# Altium PCB fhd-gs.PcbDoc
Units mil, origin at the board's own origin, x right, y up, seen from the top; angles counter-clockwise.
Board outline 1400 x 650 mil, 6 copper layers (Top Layer, 2-GND, Layer 3, Layer 4, 5-GND, Bottom Layer), stack 46.142 mil thick; 80 components, 43 nets, 282 pads, 140 vias.
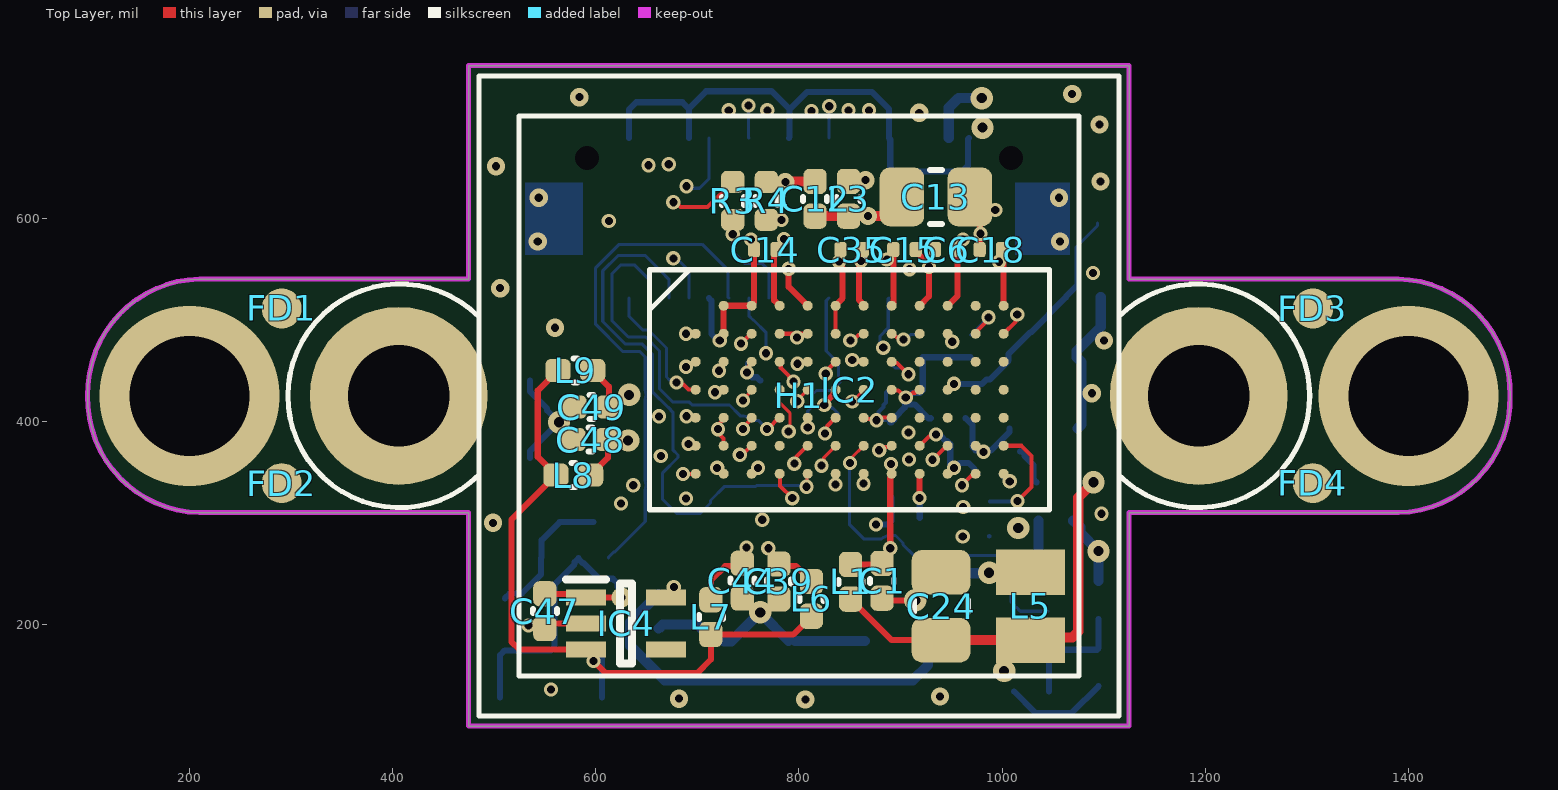
[diagram p0: Top Layer view]
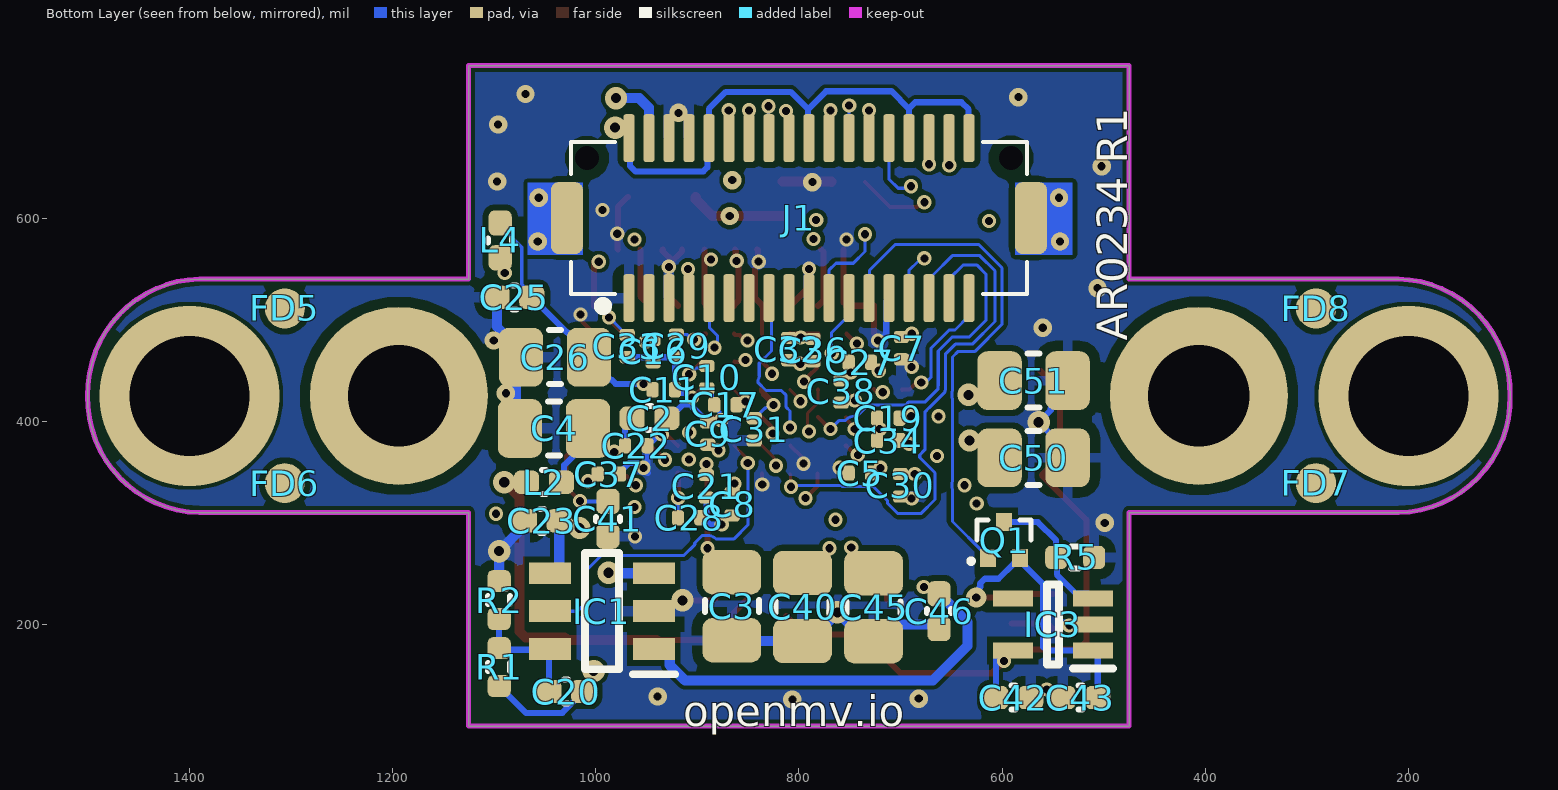
[diagram p1: Bottom Layer view, seen from below]
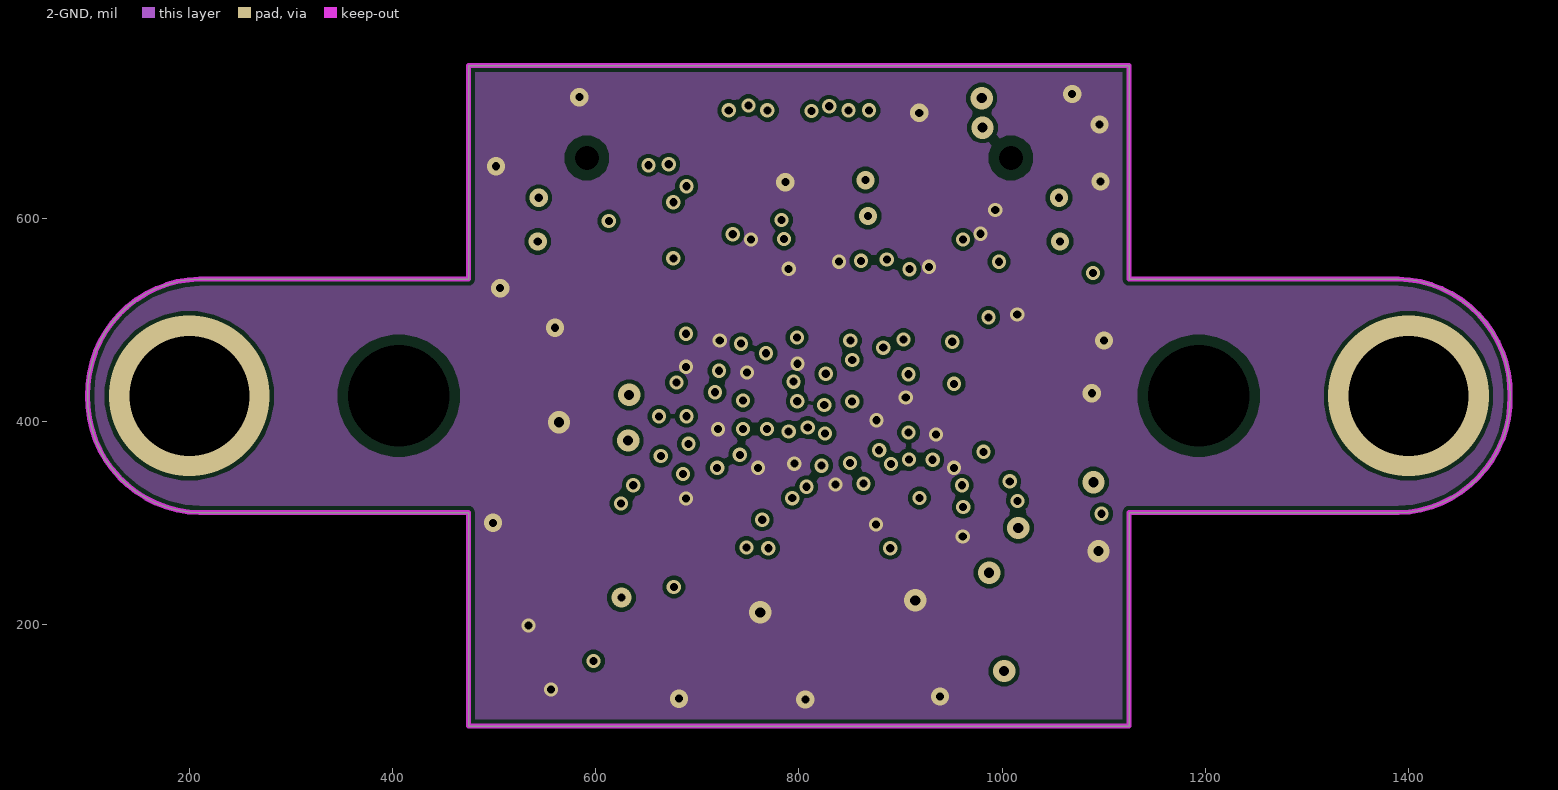
[diagram p2: 2-GND]
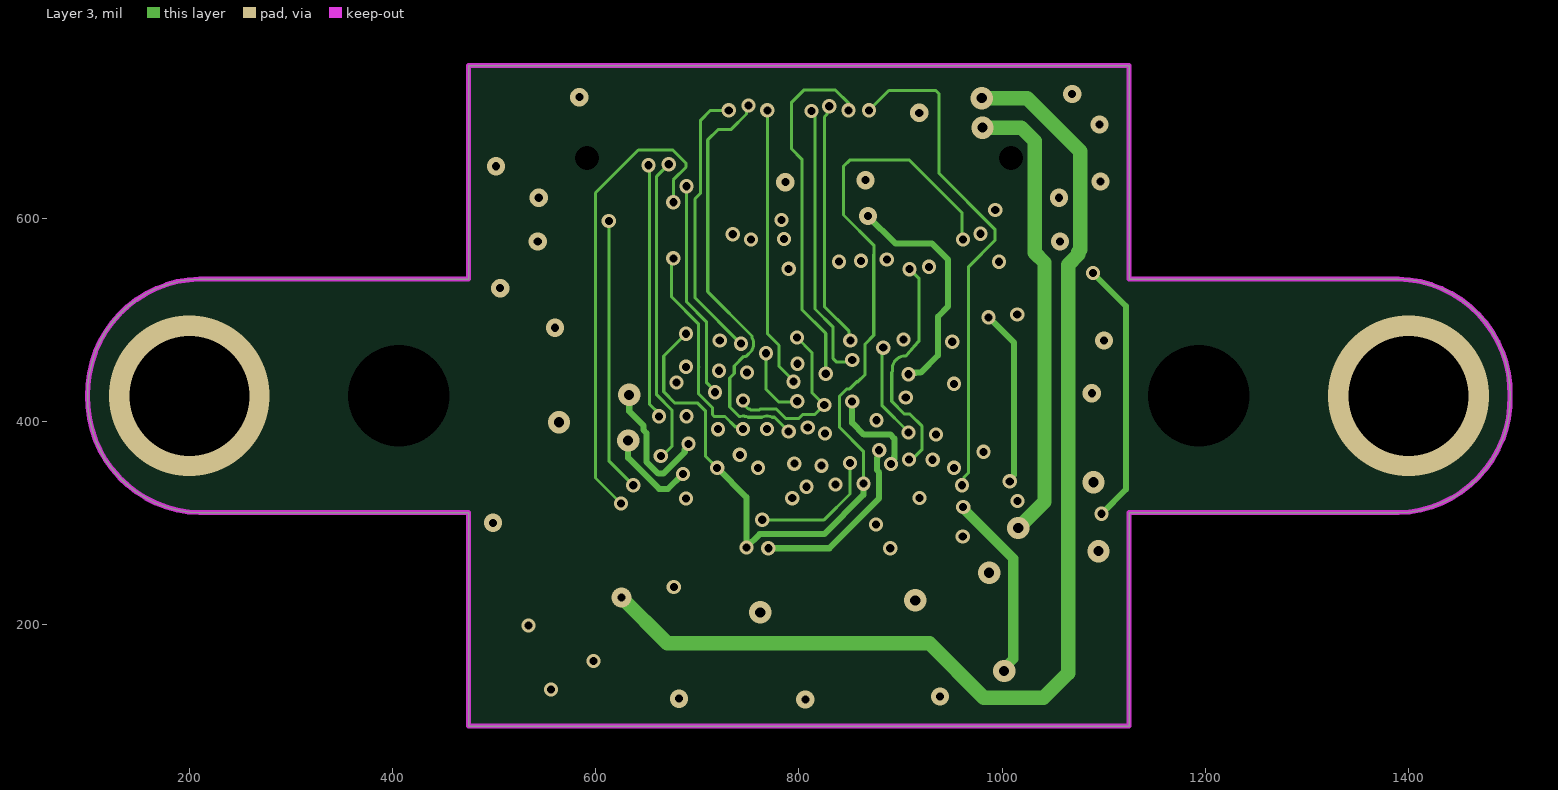
[diagram p3: Layer 3]
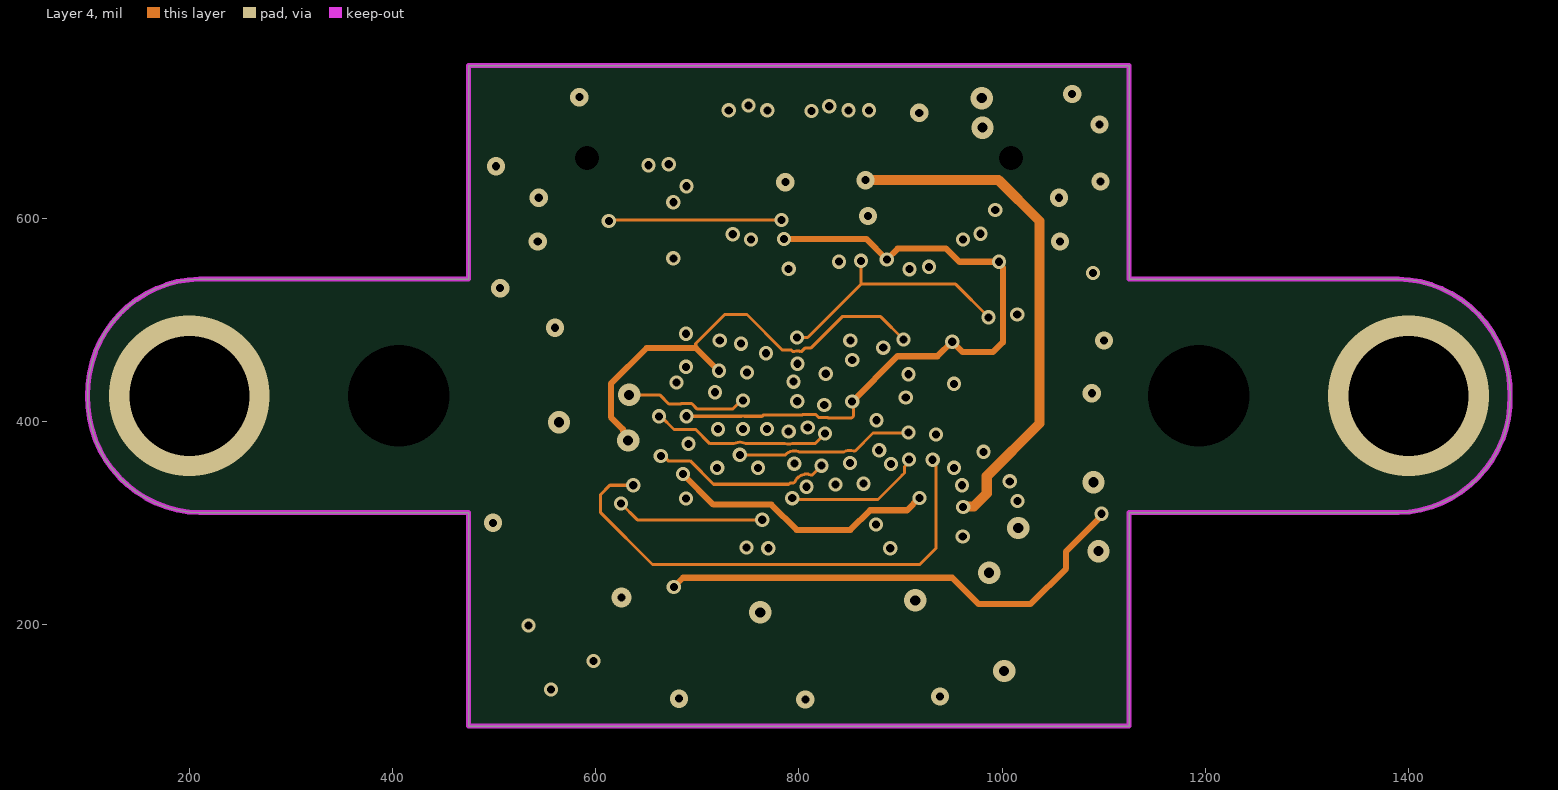
[diagram p4: Layer 4]
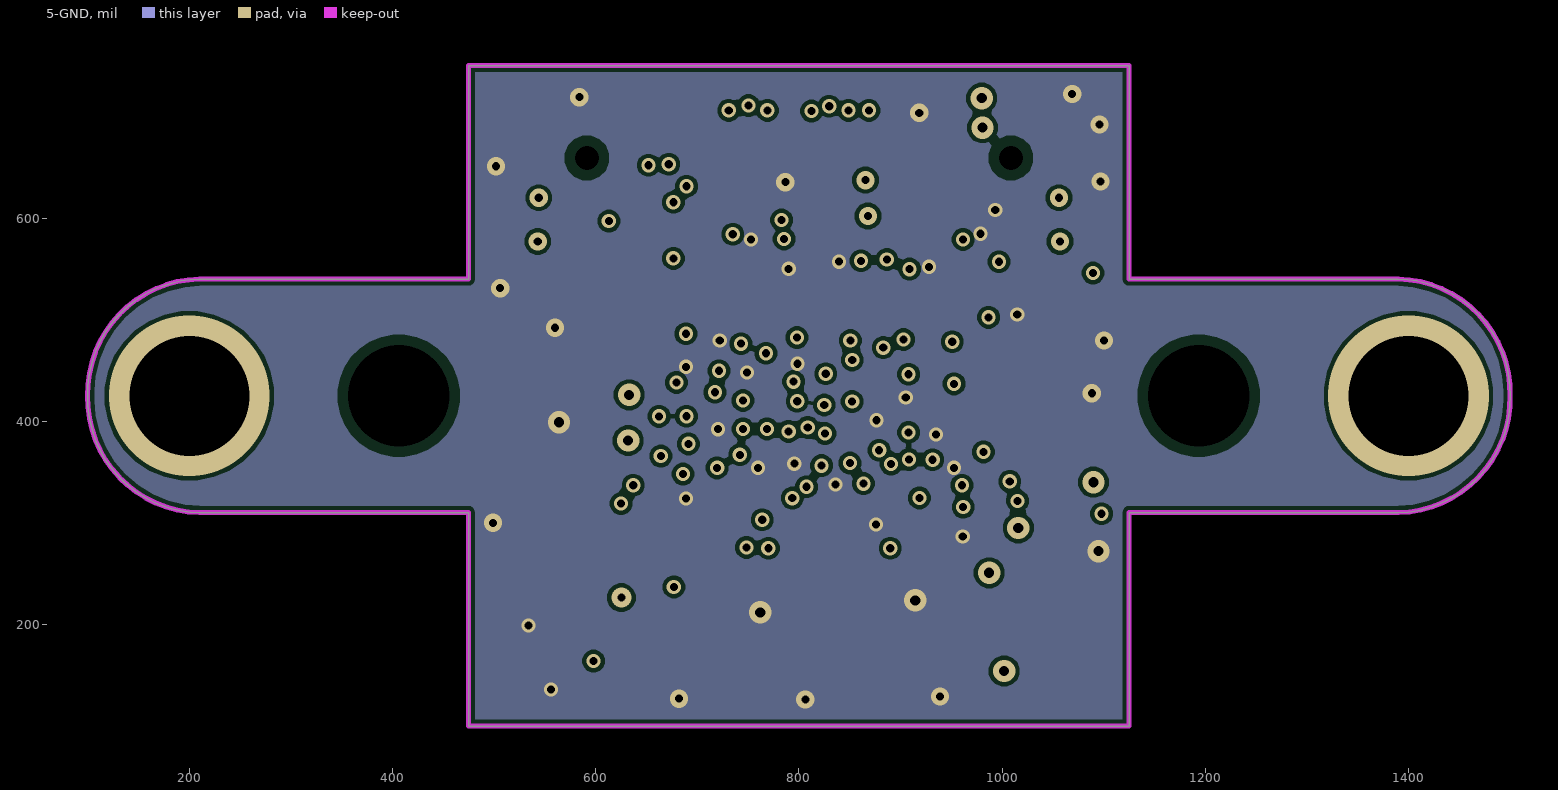
[diagram p5: 5-GND]
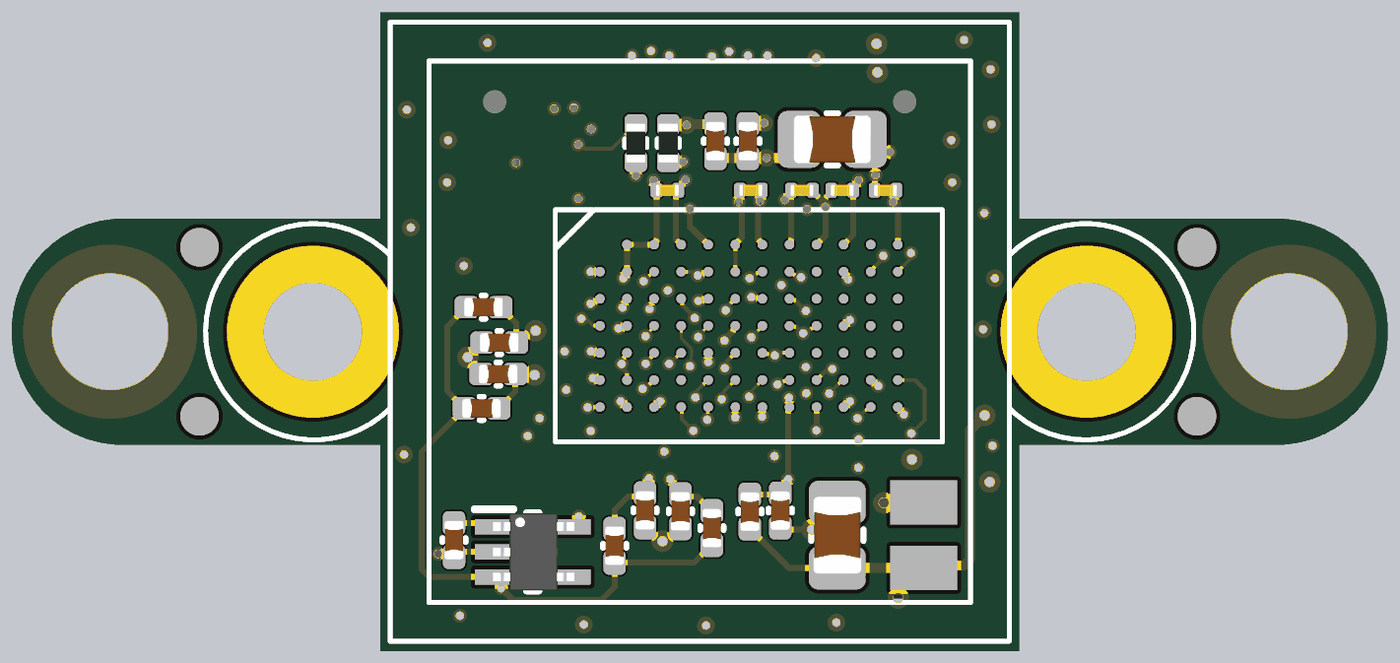
[diagram p6: 3D render of the assembled board from above, using the file's embedded part models]
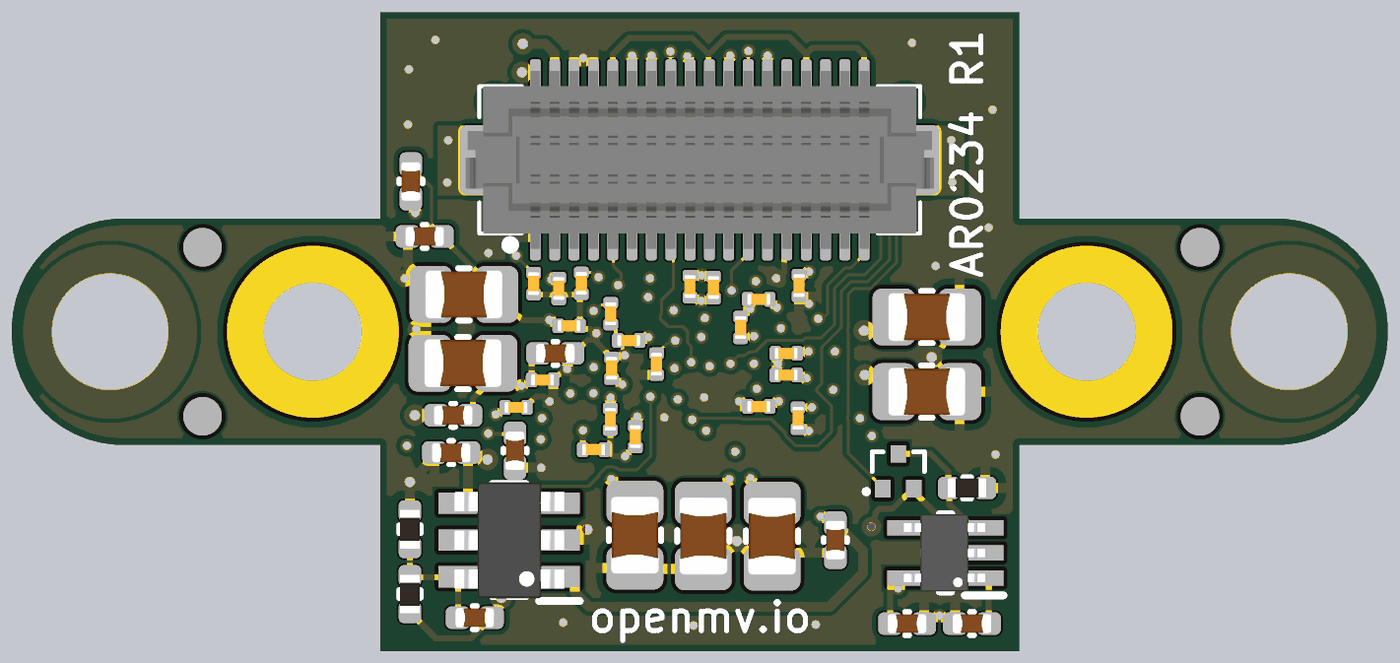
[diagram p7: 3D render of the assembled board from below, using the file's embedded part models]

## Layer stack, top to bottom
Top Solder: solder mask 0.4, Solder Resist, Dk 3.5
Top Layer: signal copper 1.378
Dielectric 2: prepreg 5, PP-006, Dk 4.1
2-GND: signal copper 1.378
Dielectric 5: prepreg 10, PP-006, Dk 4.1
Layer 3: signal copper 1.378
Dielectric 1: dielectric 7.874, FR-4, Dk 4.8
Layer 4: signal copper 1.378
Dielectric 6: prepreg 10, PP-006, Dk 4.1
5-GND: signal copper 1.378
Dielectric 9: prepreg 5, PP-006, Dk 4.1
Bottom Layer: signal copper 1.378
Bottom Solder: solder mask 0.4, Solder Resist, Dk 3.5

## Board outline
210.03,310 cw(c212.53,422.5) 100.03,425 cw(c212.53,427.5) 210.03,540 475.03,540 475.03,750 1125.03,750 1125.03,540 1390.03,540 cw(c1387.53,427.5) 1500.03,425 cw(c1387.53,422.5) 1390.03,310 1125.03,310 1125.03,100 475.03,100 475.03,310

## Design rules (kind name [scope] priority, off if disabled: settings)
BoardOutlineClearance [All] p1: gap=5 ignorepadtopadclearanceinfootprint=FALSE
Clearance [All] p1: gap=4 ignorepadtopadclearanceinfootprint=FALSE except(6: SMDPad-Fill SMDPad-Poly SMDPad-Region; 10: THPad-Fill THPad-Poly THPad-Region)
ComponentClearance Mount [InComponent('H1')] p1: gap=0 collisioncheckmode=3 verticalgap=0 showdistances=FALSE
ComponentClearance [not InComponent('H1')] p2: gap=6 collisioncheckmode=3 verticalgap=6 showdistances=FALSE
HoleSize [All] p1: absolutevalues=TRUE maxlimit=100 minlimit=8 maxpercent=80.000 minpercent=20.000
PolygonConnect [All] p1: thpad.connectstyle=Relief thpad.reliefconductorwidth=10 thpad.reliefentries=4 thpad.polygonreliefangle="90 Angle" thpad.airgapwidth=10 smdpad.connectstyle=Relief smdpad.reliefconductorwidth=10 smdpad.reliefentries=4 smdpad.polygonreliefangle="90 Angle" smdpad.airgapwidth=10 via.connectstyle=Direct via.reliefconductorwidth=10 via.reliefentries=4 via.polygonreliefangle="90 Angle" via.airgapwidth=10
RoutingVias [All] p1: holewidth=8 width=14 viastyle="Through Hole" minholewidth=8 minwidth=14 maxholewidth=50 maxwidth=100
SolderMaskExpansion [All] p1: expansion=4 istentingtop=FALSE
Width [All] p1: maxlimit=100 minlimit=3 preferedwidth=4
28 further rules are at their usual default settings.

## Components (designator, comment, footprint, x,y, rotation, side; value= is the part's Value field where it differs from the comment)
C1 "4.7uF" 0402 882,243 r90 top
C2 "4.7uF" 0402 947,403 r0 bottom
C3 "22uF" 0805 866,218 r90 bottom
C4 "22uF" 0805 1041,393 r180 bottom
C5 "0.22uF" C0201 740,349 r0 bottom
C6 "0.22uF" C0201 945,569 r180 top
C7 "0.22uF" C0201 699,472 r270 bottom
C8 "0.22uF" C0201 865.61,318.32 r270 bottom
C9 "0.22uF" C0201 889.7,387.87 r90 bottom
C10 "0.22uF" C0201 890.65,443.39 r270 bottom
C11 "0.22uF" C0201 933,431 r180 bottom
C12 "4.7uF" 0402 816,619 r270 top
C13 "22uF" 0805 934.96,620.86 r180 top
C14 "0.22uF" C0201 767,569 r180 top
C15 "0.22uF" C0201 904,569 r0 top
C16 "0.22uF" C0201 943.51,469.04 r270 bottom
C17 "0.22uF" C0201 872.33,416.15 r0 bottom
C18 "0.22uF" C0201 989,569 r180 top
C19 "0.22uF" C0201 712,403 r0 bottom
C20 "6.8pF" 0402 1029,134 r0 bottom
C21 "0.22uF" C0201 891,336 r270 bottom
C22 "0.22uF" C0201 960,376 r180 bottom
C23 "4.7uF" 0402 1053,302 r180 bottom
C24 "22uF" 0805 940,218 r270 top
C25 "4.7uF" 0402 1080,522 r180 bottom
C26 "22uF" 0805 1040,463 r180 bottom
C27 "0.22uF" C0201 740,458 r0 bottom
C28 "0.22uF" C0201 908,305 r180 bottom
C29 "0.22uF" C0201 920.53,474.24 r270 bottom
C30 "0.22uF" C0201 700,337 r270 bottom
C31 "0.22uF" C0201 844,392 r270 bottom
C32 "0.22uF" C0201 810,471 r270 bottom
C33 "0.22uF" C0201 969,474 r270 bottom
C34 "0.22uF" C0201 712,381 r0 bottom
C35 "0.22uF" C0201 852,569 r180 top
C36 "0.22uF" C0201 786,470 r270 bottom
C37 "0.22uF" C0201 987,348 r180 bottom
C38 "0.22uF" C0201 758.41,429.34 r90 bottom
C39 "4.7uF" 0402 780.4,242.32 r90 top
C40 "22uF" 0805 796.4,217.19 r90 bottom
C41 "4.7uF" 0402 988,304 r90 bottom
C42 "4.7uF" 0402 589,128 r0 bottom
C43 "4.7uF" 0402 523,128 r180 bottom
C44 "4.7uF" 0402 744.4,243.19 r90 top
C45 "22uF" 0805 726.43,216.91 r90 bottom
C46 "4.7uF" 0402 662,213 r90 bottom
C47 "4.7uF" 0402 550,213 r90 top
C48 "4.7uF" 0402 595,382 r0 top
C49 "4.7uF" 0402 596,414 r0 top
C50 "22uF" 0805 569,364 r0 bottom
C51 "22uF" 0805 569,440 r0 bottom
FD1 "FIDUCIAL1X2" FIDUCIAL-1X2 291,511 r0 top
FD2 "FIDUCIAL1X2" FIDUCIAL-1X2 291,339 r0 top
FD3 "FIDUCIAL1X2" FIDUCIAL-1X2 1306,511 r0 top
FD4 "FIDUCIAL1X2" FIDUCIAL-1X2 1306,339 r0 top
FD5 "FIDUCIAL1X2" FIDUCIAL-1X2 1306,511 r180 bottom
FD6 "FIDUCIAL1X2" FIDUCIAL-1X2 1306,339 r180 bottom
FD7 "FIDUCIAL1X2" FIDUCIAL-1X2 291,339 r180 bottom
FD8 "FIDUCIAL1X2" FIDUCIAL-1X2 291,511 r180 bottom
H1 "LENSMOUNT20MM" LENSMOUNT-20MM 800,425 r0 top locked
IC1 "TLV62568PDDCR" SOT95P280X110-6N 994,213 r0 bottom
IC2 "AR0234CSSC00SUKA0" AR0234CSSC00SUKA0 850,431 r0 top locked
IC3 "MIC5365-2.8YC5-TR" SOT65P210X110-5N 550,200 r0 bottom
IC4 "MIC5365-2.8YC5-TR" SOT65P210X110-5N 630,201 r0 top
J1 "DF12-36-DP" DF12-36-DP 800,600 r0 bottom locked
L1 "100" 0402 851,242 r270 top
L2 "100" 0402 1050.87,340 r0 bottom
L3 "100" 0402 849,619 r90 top
L4 "100" 0402 1094,578 r270 bottom
L5 "MAKK2016T2R2M" INDC2016X100N 1028,218 r90 top
L6 "100" 0402 812.4,225.19 r270 top
L7 "100" 0402 713.4,207.19 r270 top
L8 "100" 0402 578,347 r180 top
L9 "100" 0402 580,450 r180 top
Q1 "SSM3J15FV,L3F" SSM3J15FV 598,283 r180 bottom
R1 "100K" R0402 1095,158 r270 bottom
R2 "100K" R0402 1095,224 r90 bottom
R3 "10K" R0402 735,617 r270 top
R4 "1.5K" R0402 768,617 r270 top
R5 "100K" R0402 528,266 r180 bottom

## Footprints (in the part's own frame and the unit in brackets; to place one, negate y for a bottom-side part, rotate by r counter-clockwise, add the part's x,y. Pads: shape width x height; smd on the part's side, far side on the other; paste and mask are expansions set on the pad)
0402 [mm] "Chip Capacitor, 2-Leads, Body  0402 (in) 1005 (mm), IPC Medium Density"
  rrect52% 0.63x0.58 smd mask+0.05: 1(-0.435,0) 2(0.435,0)
  silkscreen extent -0.05,-0.3 0.05,0.3, body extent -0.5,-0.25 0.5,0.25, height 0.5
0805 [mm] "Chip Capacitor, Body 0805 imperial, 2.0x1.2mm, IPC Medium Density"
  rrect45% 1.11x1.47 smd: 1(-0.85,0) 2(0.85,0)
  silkscreen extent -0.15,-0.67 0.15,0.67, body extent -1,-0.62 1,0.63, height 1.25
AR0234CSSC00SUKA0 [mm] "AR0234CSSC00SUKA0"
  rrect100% 0.25x0.25 smd mask+0.051: P$1(-3.15,2.1) P$2(-2.45,2.1) P$3(-1.75,2.1) P$4(-1.05,2.1) P$5(-0.35,2.1) P$6(0.35,2.1) P$7(1.05,2.1) P$8(1.75,2.1) P$9(2.45,2.1) P$10(3.15,2.1) P$11(3.85,2.1) P$12(-3.85,1.4) P$13(-3.15,1.4) P$14(-2.45,1.4) P$15(-1.75,1.4) P$16(-1.05,1.4) P$17(-0.35,1.4) P$18(0.35,1.4) P$19(1.05,1.4) P$20(1.75,1.4) P$21(2.45,1.4) P$22(3.15,1.4) P$23(3.85,1.4) P$24(-3.85,0.7) P$25(-3.15,0.7) P$26(-2.45,0.7) P$27(-1.75,0.7) P$28(-1.05,0.7) P$29(-0.35,0.7) P$30(0.35,0.7) P$31(1.05,0.7) P$32(1.75,0.7) P$33(2.45,0.7) P$34(3.15,0.7) P$35(3.85,0.7) P$36(-3.85,0) P$37(-3.15,0) P$38(-2.45,0) P$39(-1.75,0) P$40(-1.05,0) P$41(-0.35,0) P$42(0.35,0) P$43(1.05,0) P$44(1.75,0) P$45(2.45,0) P$46(3.15,0) P$47(3.85,0) P$48(-3.85,-0.7) P$49(-3.15,-0.7) P$50(-2.45,-0.7) P$51(-1.75,-0.7) P$52(-1.05,-0.7) P$53(-0.35,-0.7) P$54(0.35,-0.7) P$55(1.05,-0.7) P$56(1.75,-0.7) P$57(2.45,-0.7) P$58(3.15,-0.7) P$59(3.85,-0.7) P$60(-3.85,-1.4) P$61(-3.15,-1.4) P$62(-2.45,-1.4) P$63(-1.75,-1.4) P$64(-1.05,-1.4) P$65(-0.35,-1.4) P$66(0.35,-1.4) P$67(1.05,-1.4) P$68(1.75,-1.4) P$69(2.45,-1.4) P$70(3.15,-1.4) P$71(3.85,-1.4) P$72(-3.85,-2.1) P$73(-3.15,-2.1) P$74(-2.45,-2.1) P$75(-1.75,-2.1) P$76(-1.05,-2.1) P$77(-0.35,-2.1) P$78(0.35,-2.1) P$79(1.05,-2.1) P$80(1.75,-2.1) P$81(2.45,-2.1) P$82(3.15,-2.1) P$83(3.85,-2.1)
  silkscreen extent -5,-3 5,3, body extent -5,-3 5,3, height 1
C0201 [mil] "0201 IPC-7351"
  rrect50% 12x15 smd mask+1.97: 1(-11,0) 2(11,0)
  body extent -12,-6 12,6, height 14
DF12-36-DP [mm] "36 Position Connector Receptacle, Center Strip Contacts Surface Mount Gold"
  rrect50% 0.8x1.8 smd mask+0.05: 0(-5.8,0) 0(5.8,0)
  rrect50% 0.28x1.2 smd mask+0.05: 1(4.25,2) 2(4.25,-2) 3(3.75,2) 4(3.75,-2) 5(3.25,2) 6(3.25,-2) 7(2.75,2) 8(2.75,-2) 9(2.25,2) 10(2.25,-2) 11(1.75,2) 12(1.75,-2) 13(1.25,2) 14(1.25,-2) 15(0.75,2) 16(0.75,-2) 17(0.25,2) 18(0.25,-2) 19(-0.25,2) 20(-0.25,-2) 21(-0.75,2) 22(-0.75,-2) 23(-1.25,2) 24(-1.25,-2) 25(-1.75,2) 26(-1.75,-2) 27(-2.25,2) 28(-2.25,-2) 29(-2.75,2) 30(-2.75,-2) 31(-3.25,2) 32(-3.25,-2) 33(-3.75,2) 34(-3.75,-2) 35(-4.25,2) 36(-4.25,-2)
  round 0 hole 0.6 unplated: MH1(-5.3,-1.5) MH2(5.3,-1.5)
  silkscreen extent -5.7,-1.9 5.7,2.3, body extent -6.05,-2.3 6.05,2.3, height 2.3
FIDUCIAL-1X2 [mm] "FIDUCIAL-1X2"
  rrect100% 1x1 smd paste+0: 1(0,0)
INDC2016X100N [mm] "INDC2016X100N"
  rect 1.14x1.73 smd: 1(-0.847,0) 2(0.847,0)
  body extent -1,-0.8 1,0.8, height 1
LENSMOUNT-20MM [mm] "LENSMOUNT-20MM"
  round 4.445 / inner round 0 / far side round 4.445 hole 2.54: P$1(-10,0) P$2(10,0)
  silkscreen extent -12.77,-8 12.77,8
R0402 [mm] "Chip Resistor, 2-Leads, Body  0402 (in) 1005 (mm), IPC Medium Density"
  rrect51% 0.55x0.58 smd mask+0.05: 1(-0.475,0) 2(0.475,0)
  silkscreen extent -0.1,-0.28 0.1,0.28, body extent -0.5,-0.25 0.5,0.25, height 0.34
SOT65P210X110-5N [mm] "SOT65P210X110-5N"
  rect 1x0.4 smd: 1(-1,0.65) 2(-1,0) 3(-1,-0.65) 4(1,-0.65) 5(1,0.65)
  silkscreen extent -1.5,-1 0.15,1.1, body extent -1.02,-1 1.07,1, height 0.96
SOT95P280X110-6N [mil] "SOT95P280X100-6N"
  rect 41.34x21.65 smd: 1(-51.18,37.4) 2(-51.18,0) 3(-51.18,-37.4) 4(51.18,-37.4) 5(51.18,0) 6(51.18,37.4)
  silkscreen extent -72,-57 17,62, body extent -56,-59 56,59, height 44
SSM3J15FV [mm]
  rect 0.4x0.45 smd: 1(-0.4,-0.45) 2(0.4,-0.45) 3(0,0.45)
  silkscreen extent -0.88,-0.58 0.67,0.5, body extent -0.6,-0.6 0.6,0.6, height 0.6

## Part data
C1 C2 C12 C23 C25 C39 C41 C42 C43 C44 C46 C47 C48 C49: library part CAP_0402, "0402 (1005 Metric) Nick Garner - TeleSense", MPN=JMK105BBJ475MV-F, DeviceSetName=CAP_0402, GateName_1=G$1, LibraryName=0402, SymbolName_1=CAP
C3 C4 C13 C24 C26 C40 C45 C50 C51: library part 22UF-0805-6.3V-20%, "22ÂµF ceramic capacitors    A capacitor is a passive two-terminal electrical component used to store electrical energy temporarily in an electric field.", MPN=CL21A226MQQNNNE, DeviceName=-0805-6.3V-20%, DeviceSetName=22UF, GateName_1=G$1, LibraryName=SparkFun-Capacitors, PROD_ID=CAP-08402, SymbolName_1=CAP
C5 C6 C7 C8 C9 C10 C11 C14 C15 C16 C17 C18 C19 C21 C22 C27 C28 C29 C30 C31 C32 C33 C34 C35 C36 C37 C38: library part C-EUC0201, "CAPACITOR, European symbol", MPN=GRM033R60J224ME15D, DeviceName=C0201, DeviceSetName=C-EU, GateName_1=G$1, LibraryName=rcl, POPULARITY=0, SPICEPREFIX=C, SymbolName_1=C-EU
C20: library part CAP_0402, "0402 (1005 Metric) Nick Garner - TeleSense", MPN=GRM1555C1H6R8DA01D, DeviceSetName=CAP_0402, GateName_1=G$1, LibraryName=0402, SymbolName_1=CAP
FD1 FD2 FD3 FD4 FD5 FD6 FD7 FD8: "Fiducial Alignment Points    Point-of-reference for pick-and-place machines and other optical instruments.", DeviceName=1X2, DeviceSetName=FIDUCIAL, GateName_1=G$1, LibraryName=SparkFun-Aesthetics, SymbolName_1=FIDUCIAL
IC1: "2.5V-5.5V input, 1A high efficiency step-down buck converter in SOT23 and SOT563 package   Source:  Datasheet", MANUFACTURER_NAME="Texas Instruments", DeviceSetName=TLV62568PDDCR, GateName_1=G$1, HEIGHT=1.1mm, LibraryName=TLV62568PDDCR, MANUFACTURER_PART_NUMBER=TLV62568PDDCR, MOUSER_PART_NUMBER=595-TLV62568PDDCR, MOUSER_PRICE-STOCK=https://www.mouser.co.uk/ProductDetail/Texas-Instruments/TLV62568PDDCR?qs=1mbolxNpo8f1FPchIXcxyQ%3D%3D, MPN=TLV62568PDDCR, SymbolName_1=TLV62568PDDCR
IC3 IC4: "IC REG LINEAR 2.8V 150MA SC70-5   Source:  Datasheet", MANUFACTURER_NAME=Microchip, DeviceSetName=MIC5365-2.8YC5-TR, GateName_1=G$1, HEIGHT=1.1mm, LibraryName=MIC5365-2.8YC5-TR, MANUFACTURER_PART_NUMBER=MIC5365-2.8YC5-TR, MOUSER_PART_NUMBER=998-MIC5365-2.8YC5TR, MOUSER_PRICE-STOCK=https://www.mouser.co.uk/ProductDetail/Microchip-Technology-Atmel/MIC5365-2.8YC5-TR?qs=U6T8BxXiZAX3mJDSWJyjVA%3D%3D, MPN=MIC5365-2.8YC5-TR, SymbolName_1=MIC5365-2.8YC5-TR
J1: MPN=DF12NB(3.0)-36DP-0.5V(51), DeviceSetName=DF12-36-DP, GateName_1=G$1, LibraryName=DF12NB(3.0)-36DP-0.5V(51), SymbolName_1=DF12-36
L1 L2 L3 L4 L6 L7 L8 L9: library part INDUCTOR_0402, MPN=MFBM1V1005-101-R, DeviceSetName=INDUCTOR_0402, GateName_1=G$1, LibraryName=0402, SymbolName_1=INDUCTOR
L5: "INDUCTOR, METAL CORE Check availability", PACKAGE="2016 Taiyo Yuden", AVAILABILITY="In Stock", DeviceSetName=MAKK2016T2R2M, GateName_1=G$1, LibraryName=MAKK2016T2R2M, MF="Taiyo Yuden", MP=MAKK2016T2R2M, MPN=MAKK2016T2R2M, PRICE=None, PURCHASE-URL=https://pricing.snapeda.com/search/part/MAKK2016T2R2M/?ref=eda, SymbolName_1=MAKK2016T2R2M
Q1: library part PMXB120EPEZ, "MOSFET 30 V, P-channel Trench MOSFET   Source:  Datasheet", DeviceSetName=SSM3J15FV,L3F, GateName_1=G$1, HEIGHT=0.4mm, LibraryName=SSM3J15FV,L3F, MANUFACTURER_PART_NUMBER=SSM3J15FV,L3F, MOUSER_PART_NUMBER=SSM3J15FV,L3F, MPN=SSM3J15FV,L3F, SymbolName_1=SSM3J15FV,L3F
R1 R2 R5: library part R-US_R0402, "RESISTOR, American symbol", MPN=AC0402FR-07100KL, DeviceName=R0402, DeviceSetName=R-US_, GateName_1=G$1, LibraryName=rcl, POPULARITY=34, SPICEPREFIX=R, SymbolName_1=R-US
R3: library part R-US_R0402, "RESISTOR, American symbol", MPN=AC0402FR-1310KL, DeviceName=R0402, DeviceSetName=R-US_, GateName_1=G$1, LibraryName=rcl, POPULARITY=34, SPICEPREFIX=R, SymbolName_1=R-US
R4: library part R-US_R0402, "RESISTOR, American symbol", MPN=RC0402FR-131K5L, DeviceName=R0402, DeviceSetName=R-US_, GateName_1=G$1, LibraryName=rcl, POPULARITY=34, SPICEPREFIX=R, SymbolName_1=R-US
H1: DeviceName=20MM, DeviceSetName=LENSMOUNT, GateName_1=G$1, LibraryName=lensmount, SymbolName_1=LENS
IC2: DeviceSetName=AR0234CSSC00SUKA0, GateName_1=G$1, LibraryName=AR0234CSSC00SUKA0, MPN=AR0234CSSC00SUKA0, SymbolName_1=AR0234CSSC00SUKA0

## Via types
v1: diameter 14, hole 8, Top Layer to Bottom Layer, tented both sides, 104 vias
v2: diameter 18, hole 8, Top Layer to Bottom Layer, tented both sides, 21 vias
v3: diameter 22, hole 10, Top Layer to Bottom Layer, tented both sides, 12 vias
v4: diameter 177.17/158.11/158.11/158.11/158.11/177.17 (per signal layer), hole 118.11, Top Layer to Bottom Layer, 2 vias
v5: diameter 20, hole 8, Top Layer to Bottom Layer, tented both sides, 1 vias

## Nets (pads, with @x,y where several pads share a name; then routed paths per layer and width w, separated by ;. In a path a pad name is that pad's centre, name@x,y a point inside that pad or via, vN(x,y) a via of type N, cw(c..) or ccw(c..) an arc to the next point about the centre after c; other vN are vias at no path point)
DCMI_CLK: IC2.P$82 J1.12 | length 517.6
  Top Layer w4: v1(960.57,337.06) 969.49,345.98 970.1,345.98 972.44,348.32 IC2.P$82@973.48,348.32
  Layer 3 w3: v1(869,706) 888.64,725.64 934.85,725.64 938,722.49 938,644 992.95,589.05 992.95,577.95 967.1,552.1 967.1,349.47 962.68,345.05 962.68,339.16 v1(960.57,337.06)
DCMI_D0: IC2.P$62 J1.9 | length 335.9
  Top Layer w4: v1(741.95,366.96) 744.21,366.96 753.13,375.88 IC2.P$62@754.08,375.88
  Layer 3 w3: v1@881.66,472.34 881.66,415.68 908,389.34 v1(908,389)
  Layer 4 w3: v1(741.95,366.96) 786.63,366.96 cw(c795.59,358.25) 799.57,370.1 cw(c795.59,358.25) 800.01,369.95 844.62,369.95 cw(c850.31,358.82) 853.83,370.81 854.23,370.81 855.48,370.81 873.1,388.43 907.43,388.43 v1(908,389)
  Bottom Layer w3: v1@880,474 880,484 888,492 888,520.68 J1.9
  other v1: 883.09,472.43
DCMI_D1: IC2.P$75 J1.7 | length 388.2
  Top Layer w4: IC2.P$75@781.64,348.32 781.64,336.24 v1(793.57,324.31)
  Layer 3 w3: v1(909.05,549.71) 918.4,540.36 918.4,479.06 917.66,478.21 906.28,465.18 906.21,465.11 905.33,464.23 904.9,464.23 ccw(c904.52,451.74) 892.09,450.39 cw(c889.11,450.07) 891.5,448.26 891.44,448.18 891.44,419.56 904,407 909.4,407 921.4,395 921.4,372.4 v1@912.61,363.61
  Layer 4 w3: v1(793.57,324.31) 794.88,323 878,323 901.11,346.11 901.11,346.24 904,349.13 904,355.2 908.31,359.51 v1(908.31,362.46)
DCMI_D2: IC2.P$76 J1.31 | length 545.2
  Top Layer w3: v1(807.66,335.5) 808.16,336 808.16,347.82 IC2.P$76
  Bottom Layer w3: J1.31 672.05,539.78 668.54,543.29 668.54,543.46 649,563 622,563 607,548 607,498.23 629.35,475.88 646.02,475.88 655.82,466.08 655.82,431.91 ccw(c658.82,431.95) 655.89,431.32 cw(c633,426) 656.35,428.65 670.8,414.2 cw(c662.5,404.85) 671.85,413.15 676,409 676,371.83 681.03,366.8 681.03,364.31 666,349.28 666,323 680,309 702.52,309 713,319.48 713,322 727,336 757.52,336 758.33,336.81 806.36,336.81 v1(807.66,335.5)
DCMI_D3: IC2.P$50 J1.29 | length 269
  Top Layer w4: v1(745.03,392.5) 745.03,393.71 753.54,402.23 IC2.P$50@753.54,403.57
  Layer 3 w3: v1(676.5,560.35) 674.8,558.65 674.8,522.2 701.41,495.59 701.41,454.83 cw(c688.98,453.56) 701.41,452.3 701.41,426.86 715,413.27 715,406.47 716.76,404.71 727.29,404.71 737.4,394.6 742.92,394.6 v1(745.03,392.5)
  Bottom Layer w3: v1(676.5,560.35) 678.6,558.25 681.86,558.25 691.73,548.38 J1.29
DCMI_D4: IC2.P$36 J1.35 | length 130.2
  Top Layer w4: v1(679.53,438.24) 681.44,436.33 686.37,436.33 691.34,431.36 698.07,431.36 IC2.P$36
  Bottom Layer w3: J1.35 632.68,503.56 646.36,489.88 652.08,489.88 669.82,472.14 669.82,443.56 673.04,440.35 677.42,440.35 v1(679.53,438.24)
DCMI_D5: IC2.P$37 J1.28 | length 290.8
  Top Layer w4: v1(717.41,428.54) 718.76,429.88 724.32,429.88 IC2.P$37@725.98,431.54
  Layer 3 w3: v1(689.56,631.26) 689.56,517.34 708.93,497.97 708.93,438.28 717.41,429.8 v1(717.41,428.54)
  Bottom Layer w3: v1(689.56,631.26) 691.49,629.33 702.33,629.33 711.42,638.42 J1.28
DCMI_D6: IC2.P$14 J1.26 | length 286.8
  Top Layer w4: v1(742.96,476.35) 743.23,476.35 IC2.P$14@753,486.12
  Layer 3 w3: v1(731,706) 713,706 703.38,696.38 703.38,624.62 697.73,618.97 697.73,521.58 v1(742.96,476.35)
DCMI_D7: IC2.P$51 J1.33 | length 345.5
  Top Layer w4: v1(768.75,392.5) 769.62,392.5 IC2.P$51@781.1,403.98
  Bottom Layer w3: J1.33 652.36,539.64 638,554 625,554 616,545 616,499.13 632.25,482.88 649.19,482.88 662.82,469.24 662.82,435.33 ; 662.82,435.31 662.89,434.74 662.89,432.07 cw(c633,426) 662.91,431.99 675.62,419.28 cw(c662.5,404.85) 676.08,418.85 692.29,418.85 695.1,416.04 731.68,416.04 741.88,405.84 742.76,404.97 744,404.97 744.1,404.97 cw(c745.03,392.5) 754.02,401.18 754.57,400.63 760.62,400.63 v1(768.75,392.5)
DCMI_D8: IC2.P$39 J1.24 | length 495.7
  Top Layer w3: IC2.P$39@781.1,430.57 781.1,418.18 791.52,407.76 791.52,399.12 791.33,398.93 791.33,391.33 v1(790,390)
  Top Layer w4: IC2.P$39@781.1,430.57 IC2.P$39
  Layer 3 w3: v1(750.52,710.66) 748.46,708.6 748.46,702.46 733,687 720.38,687 710.38,677 710.38,527.56 754,483.94 754,482.21 cw(c742.96,476.35) 754,470.49 754,469.72 748.13,463.85 745.85,463.85 736.45,454.45 736.45,447.03 732,442.58 732,414 740.34,405.66 741.21,404.79 742.46,404.79 742.72,404.79 cw(c745.03,392.5) 750.11,403.92 763.67,403.92 cw(c768.75,392.5) 773.83,403.92 776.08,403.92 v1(790,390)
  Bottom Layer w3: v1(750.52,710.66) 750.66,710.53 750.66,678.87 J1.24
DCMI_D9: IC2.P$27 J1.22 | length 288.6
  Top Layer w4: IC2.P$27 782.22,457.44 782.22,452.49 v1@790.39,444.32
  Layer 3 w3: v1(769,706) 769,486.31 780.57,474.74 780.57,454.14 v1@790.39,444.32
  other v1: 794.88,438.97
DCMI_FSIN: IC2.P$40 J1.23 | length 148.9
  Top Layer w3: v1(798.41,419.68) 798.41,420.75 IC2.P$40
  Layer 3 w3: v1(767.59,466.98) 767.59,431.66 780.25,419 797.73,419 v1(798.41,419.68)
  Bottom Layer w3: J1.23 750.79,503.83 754.98,499.64 755.36,499.64 767.85,487.15 767.85,467.24 v1(767.59,466.98)
DCMI_HSYNC: IC2.P$30 J1.18 | length 283.5
  Top Layer w4: v1@851.82,458.16 852.16,458.5 863.18,458.5 IC2.P$30@863.24,458.56
  Layer 3 w3: v1(812.58,705.26) 812.58,703.64 816,700.22 816,510.42 833.79,492.63 833.79,461.6 837.23,458.16 v1@851.82,458.16
  other v1: 852.53,460.27
DCMI_PCLK: IC2.P$29 J1.14 | length 370.2
  Top Layer w4: v1(826.5,446.78) 826.5,448.84 IC2.P$29
  Layer 3 w3: v1(826.5,446.78) 826.5,486.5 803,510 803,658 793,668 793,714.07 804.85,725.92 836.08,725.92 849,713 v1(849,706)
DCMI_PWDN: J1.25 Q1.1 | length 509.7
  Bottom Layer w3: Q1.1@612.76,265.28 612.76,266.26 617.65,271.15 618.63,271.15 648.82,301.34 648.82,332.94 ccw(c637,337) 648.82,341.06 648.82,421.32 ccw(c633,426) 648.82,430.68 648.82,463.18 643.12,468.88 626.45,468.88 600,495.33 600,550.97 623.16,574.14 704.86,574.14 730.46,548.54 730.46,521.9 J1.25
DCMI_RST: J1.21 R3.2 | length 87.4
  Bottom Layer w3: v1(735,584) 735,567 746.5,555.5 763.5,555.5 770.46,548.54 J1.21
DCMI_SCL: IC2.P$65 J1.32 | length 506.7
  Top Layer w3: v1(822.44,356.29) 824.54,358.4 824.54,364.19 IC2.P$65
  Layer 3 w3: v1(664.17,365.77) 665.68,365.77 675,375.09 675,411.02 660.03,426 660.03,641.03 v1(672,653)
  Layer 4 w3: v1(664.17,365.77) 666.66,365.77 671.43,361 693,361 716,338 790,338 791.23,339.23 794.94,339.23 795.82,340.11 796.2,340.49 cw(c807.66,335.5) 811.74,347.32 812.22,347.32 813.46,347.32 v1(822.44,356.29)
DCMI_SDA: IC2.P$53 J1.34 | length 450.7
  Top Layer w4: v1(825.72,387.84) 827.63,389.76 827.63,395.09 IC2.P$53@836.22,403.68
  Layer 3 w3: v1(652,652) 653,651 653,416.75 662.5,407.25 v1(662.5,404.85)
  Layer 4 w3: v1(662.5,404.85) 664.15,404.85 677.2,391.8 698.55,391.8 712.35,378 736.08,378 cw(c741.95,366.96) 747.83,378 786.5,378 ccw(c790,390) 793.5,378 815.87,378 v1(825.72,387.84)
DCMI_VSYNC: IC2.P$18 J1.16 | length 290.4
  Top Layer w4: v1(850.69,479.49) 853.11,479.49 858.62,485 862.66,485 IC2.P$18
  Layer 3 w3: v1(829.92,710.11) 827.81,708 827.81,702.13 825.34,699.66 825.34,512.71 849.5,488.56 849.5,480.69 v1(850.69,479.49)
  Bottom Layer w3: J1.16 829.72,678.93 829.72,709.91 v1(829.92,710.11)
GND: C1.1 C2.1 C3.1 C4.1 C5.2 C6.2 C7.2 C8.2 C9.2 C10.2 C11.2 C12.1 C13.1 C14.2 C15.2 C16.2 C17.2 C18.2 C19.2 C21.2 C22.2 C23.1 C24.1 C25.1 C26.1 C27.2 C28.2 C29.2 C30.2 C31.2 C32.2 C33.2 C34.2 C35.2 C36.2 C37.2 C38.2 C39.1 C40.1 C41.1 C42.1 C43.1 C44.1 C45.1 C46.1 C47.1 C48.1 C49.1 C50.1 C51.1 IC1.2 IC2.P$1 IC2.P$2 IC2.P$4 IC2.P$5 IC2.P$8 IC2.P$13 IC2.P$17 IC2.P$23 IC2.P$24 IC2.P$26 IC2.P$28 IC2.P$43 IC2.P$44 IC2.P$49 IC2.P$54 IC2.P$55 IC2.P$61 IC2.P$64 IC2.P$68 IC2.P$74 IC2.P$77 IC2.P$81 IC3.2 IC4.2 J1.1 J1.3 J1.5 J1.6 J1.8 J1.19 J1.27 R2.2 R4.1 R5.2 | length 1668.5
  Top Layer w4: v1(688.98,453.56) 690.89,455.48 693.76,455.48 696.85,458.56 IC2.P$24@697.89,458.56 ; v1(720.5,392.21) v1@718.7,390.42 ; v1(722.22,479.4) 722.22,480.88 725.44,484.1 IC2.P$13@725.44,486.12 ; IC2.P$61 725.89,375.97 725.89,383.23 722.41,386.7 722.41,387.6 719.59,390.42 v1@718.7,390.42 ; IC2.P$49 725.98,401.86 722.41,398.29 722.41,394.13 v1@718.7,390.42 ; v1(748.95,448.11) 750.86,450.02 750.86,454.3 754.08,457.52 IC2.P$26@754.08,458.56 ; IC2.P$74@754.08,348.32 v1(759.92,354.16) ; v1(795.59,358.25) 797.5,360.17 797.5,365.26 IC2.P$64@808.12,375.88 ; v1(798.68,456.57) 799.67,457.56 807.12,457.56 IC2.P$28@808.12,458.56 ; v1(836.04,337.78) 836.13,337.87 836.13,348.23 IC2.P$77 ; IC2.P$17 IC2.P$5 ; IC2.P$54 864.9,402.32 875.02,402.32 v1(876.41,400.93) ; v1@881.68,403.5 890.86,403.5 IC2.P$55@891.34,403.98 ; IC2.P$43 892.24,430.1 897.88,430.1 904.53,423.45 v1(905.23,423.45) ; v1@907.33,422.85 912.56,428.08 914.4,428.08 917.86,431.54 IC2.P$44@918.9,431.54 ; IC2.P$68 928.17,385.15 ; IC2.P$23 1013.09,497.64 1013.09,503.09 v1(1015,505)
  Top Layer w6: C47.1 555.13,201 IC4.2 ; IC2.P$13@725.44,486.12 725.98,486.66 IC2.P$1 ; IC2.P$1@729.73,513.64 IC2.P$2@753.5,513.64 ; IC2.P$2@753.24,514.41 756,517.18 C14.2 ; v1(790,550) 790,532.34 IC2.P$4 IC2.P$4@807.93,512.95 ; IC2.P$5 836.22,514.33 843.04,521.16 843.04,551.47 841.14,553.38 841.14,555.17 843.04,557.07 840.3,559.81 840.3,568.3 C35.2 ; C1.1 884.2,223.67 v3(914.55,223.67) ; C15.2 915,567.5 928.02,554.48 v1@928.02,553.23 ; IC2.P$8 928.02,522.8 v1@928.02,553.23 ; C6.2 934,567.5 928.02,561.52 v1@928.02,553.23 ; C13.1 978.14,611.15 978.14,585.24 v1(978.83,584.55) ; C18.2 978.41,569.41 978.41,581.79 v1@978,582.2
  Top Layer w10: R4.1 768.43,636.13 C12.1
  Bottom Layer w3: v1@876.48,401 C9.2@891.61,401
  Bottom Layer w4: v1(876.41,400.93) v1@876.48,401 ; v1@878.33,402.85 878.33,409.11 883.33,414.11 C17.2 885.66,418.49 885.66,428.36 889.69,432.39 C10.2 ; C41.1@987.42,286.71 C41.1@987.42,286.87
  Bottom Layer w6: C50.1 535.54,370.81 563.72,399 v3(564,399) 552.15,410.85 552.15,412.61 535.54,429.22 C51.1 ; J1.27 713.93,518.75 713.93,497.19 714,497.12 714,485.88 719.72,480.16 721.46,480.16 v1(722.22,479.4) ; C45.1@720.21,189.66 C45.1 ; C27.2 749.97,456.97 749.97,449.13 v1(748.95,448.11) 749.14,448.11 753.91,443.34 758.66,443.34 C38.2@762,440 ; C40.1@789.79,183.73 C40.1 ; C3.1@865.19,183.73 C3.1 ; v1(876,298.42) 887.49,298.42 891,301.93 C21.2 ; C9.2 891.2,398.87 894.2,401.87 894.2,403.37 904.44,413.61 v1@904.44,416.63 ; C11.2 922,430.7 919,427.7 911.64,427.7 907.39,423.45 v1(905.23,423.45) 904.44,422.66 v1@904.44,416.63 ; C11.2 922,463 C33.2 ; C2.1 927.57,403 913.94,416.63 v1@904.44,416.63 ; v1(934.93,387.06) 936.46,385.53 939.47,385.53 944.5,380.5 946,380.5 949,377.5 C22.2 949,349.39 v1@948.78,349.16 ; v1(952.84,354.16) 953.52,354.16 958.36,359 967,359 973,353 973,351 C37.2
  Bottom Layer w10: C46.1 666.12,200 700.17,200 710.51,189.66 C45.1@720.21,189.66 ; C45.1 733.57,183.44 762.03,211.9 v3(762.1,211.9) 762.1,211.43 C40.1@789.79,183.73 ; C40.1 C3.1@865.19,183.73 ; C23.1 1070.6,302 1076.95,295.65 1076.95,290.26 v3(1095.01,272.2) R2.2 ; C4.1 1078.35,396.89 1078.35,458.11 C26.1 1073.46,469.13 1097.13,492.79 C25.1
  other v1: 556,136 533.83,199.02 961.35,286.58 689,324 928,552 839.61,557.07 753,579 993.35,607.88
  other v2: 806.39,126.05 682,127 939,129 499,300 1088.42,427.59 1100.36,479.39 560,492 506,531 786.72,635.38 1097,636 502,651 1096,692 918.58,703.52 584,719 1069,722
NetC20_2: C20.2 IC1.6 R1.1 R2.1 | length 104.2
  Bottom Layer w6: IC1.6 1046.13,174.65 C20.2 ; IC1.6@1062,175.13 1093.43,175.13 R1.1 R2.1
NetC41_2: C41.2 IC2.P$71 | length 109.2
  Top Layer w4: IC2.P$71 1019.12,375.88 1029,366 1029,335.19 v1(1015.31,321.51)
  Bottom Layer w4: C41.2 1014.93,321.13 v1(1015.31,321.51)
NetIC1_3: IC1.3 L5.2 | length 44.7
  Bottom Layer w10: IC1.3 986.84,250.4 v3(987.32,250.88)
NetIC2_P$69: IC2.P$69 R4.2 | length 960
  Top Layer w4: v1@931.86,362.29 945.45,375.88 IC2.P$69@945.92,375.88
  Layer 3 w3: v1(613,597) 613,361 v1(637,337)
  Layer 4 w3: v1(613,597) 613.96,597.96 v1(782.98,597.96) ; v1(637,337) 614,337 605,328 605,310 656,259 919,259 935,275 935,355.92 931.73,359.19 v1(931.73,362.17)
NetIC3_3: IC3.3 Q1.3 R5.1 | length 137.8
  Bottom Layer w6: IC3.3 515.5,230.47 527.47,230.47 546.1,249.1 546.1,265.4 R5.1 546.9,266.2 546.9,282.9 564.72,300.72 Q1.3
RESET_N: IC1.5 IC2.P$66 R3.1 | length 1151
  Top Layer w3: v1(850.31,358.82) 852.42,360.92 852.42,364.52 IC2.P$66
  Top Layer w4: v1(676.5,615.5) 679.21,615.5 683.7,611 710.3,611 R3.1
  Layer 3 w3: v1(625,319) 599.83,344.17 599.83,624.83 642,667 676,667 689,654 689,650.14 676.5,637.64 v1(676.5,615.5) ; v1(763.96,303) 825,303 850.31,328.31 v1(850.31,358.82)
  Layer 4 w3: v1(625,319) 641,303 v1(763.96,303)
  Bottom Layer w3: v1(850.31,358.82) 850,358.5 850,298 863.76,284.24 881.58,284.24 cw(c890,275) 890,287.5 895.18,287.5 902.5,280.18 902.5,278.5 913,268 994.3,268 1009,253.3 1009,222 1018,213 IC1.5
SPI_MISO: IC2.P$52 J1.15 | length 155.4
  Bottom Layer w3: v1(808.78,393.95) 808.78,410.1 812.5,413.82 812.5,425.5 817.3,430.3 832.3,430.3 840.36,438.36 840.36,439.6 840.36,440.23 cw(c854.45,446.78) 839,445.12 839,445.29 839,457.14 827,469.14 827,518.73 J1.15
SPI_MOSI: J1.17
SPI_SCLK: J1.13
SPI_SSEL: J1.11
VAA: C5.1 C6.1 C7.1 C8.1 C44.2 C45.2 IC2.P$9 IC2.P$12 IC2.P$73 IC2.P$78 L7.1 | length 1048.5
  Top Layer w6: L7.1 713.4,243.4 727.5,257.5 741.59,257.5 C44.2 ; IC2.P$9 956,523.22 C6.1
  Layer 3 w3: v1(688.9,486.11) 667.03,464.24 667.03,428.9 678.11,417.82 700.56,417.82 708,410.37 708,365.76 v1(719.6,354.16) ; v1(863.53,338.58) 863.53,370.53 840,394.05 840,424.59 847.32,431.92 850.03,431.92 856.97,438.86 858.14,438.86 865.03,445.76 865.03,475.85 873.76,484.57 873.76,564.07 874.2,564.51 874.2,572.8 844,603 844,651 850,657 909,657 960.69,605.31 960.69,580.01 v1(961.71,579)
  Layer 3 w6: v1(719.6,354.16) 748.41,325.35 v1(748.41,275.85) 761.56,289 825,289 863.53,327.53 v1(863.53,338.58)
VAA_PHY: C9.1 C39.2 C40.2 IC2.P$67 L6.1 | length 231.3
  Top Layer w4: v1(879.07,371.46) 881.78,371.46 885.08,374.76 889.68,374.76 IC2.P$67@890.8,375.88
  Top Layer w6: C39.2 782.43,257.42 797.31,257.42 L6.1
  Layer 3 w6: v1(770,275) 830,275 879.07,324.07 879.07,349.75 876.81,352.01 876.81,363.61 877.54,364.34 877.54,369.93 v1(879.07,371.46)
VAA_PIX: C27.1 C28.1 C29.1 C30.1 C48.2 C50.2 IC2.P$19 IC2.P$25 IC2.P$72 IC2.P$80 L8.1 | length 952.8
  Top Layer w4: v1@686.16,348.16 IC2.P$72@698.27,348.16 ; v1(721.43,449.69) 723.35,451.61 723.35,454.35 725.44,456.44 IC2.P$25@725.44,458.56 ; IC2.P$19 892.92,486.12 896.63,482.41 901.14,482.41 v1(903.05,480.49)
  Top Layer w6: L8.1 612.13,364 C48.2 ; v1(686,348) v1@686.16,348.16 ; IC2.P$72@698.27,348.16 IC2.P$72 ; v1(918.73,324.58) 918.9,324.75 IC2.P$80
  Layer 3 w6: v3(632,381) 632,364 662.65,333.35 671.24,333.35 v1@685.94,348.06
  Layer 4 w3: 698.54,472.11 698.54,476.54 727,505 749,505 784,470 792.54,470 793.88,468.65 795.13,468.65 795.49,468.65 cw(c798.68,456.57) 802.38,468.51 805.87,472 811.62,472 842.62,503 880.59,503 v1(903.05,480.49)
  Layer 4 w6: v3(632,381) 632,385.33 626.86,390.47 626.86,392.14 615,404 615,437 650.11,472.11 698.54,472.11 v1@720.96,449.69 ; v1(686,348) 715.99,318.01 772.99,318.01 798,293 850.79,293 870.2,312.42 906.56,312.42 v1(918.73,324.58)
  Bottom Layer w3: v1(903.05,480.49) 905.14,480.49 909.89,485.24 C29.1
  Bottom Layer w6: v1(918.73,324.58) 919,324.31 C28.1
VCC: C23.2 IC1.4 J1.2 J1.10 J1.20 J1.30 J1.36 | length 1051.3
  Layer 3 w14: v3(980.83,688.97) 1019.03,688.97 1032.14,675.86 1032.14,565.86 1041.83,556.17 1041.83,320.83 v3(1016,295)
  Bottom Layer w6: J1.36 633,679.06 633,707 640,714 685.46,714 691.73,707.73 ; J1.30 691.73,707.73 ; J1.20 791,679.58 791,707 ; J1.2 966.41,677.83 966.41,651.41 961,646 894,646 890,650 890,677.32 J1.10 888.58,707.42 871.89,724.11 808.11,724.11 791,707 ; 691.73,707.73 708.8,724.8 773.2,724.8 791,707
  Bottom Layer w10: C23.2 1035.87,256.23 1041.7,250.4 IC1.4
VDD: C1.2 C3.2 C14.1 C15.1 C16.1 C17.1 C18.1 C19.1 C21.1 IC2.P$3 IC2.P$7 IC2.P$11 IC2.P$21 IC2.P$42 IC2.P$48 IC2.P$79 L1.1 | length 1058.1
  Top Layer w3: v1(852.5,419.42) 863.78,430.7 IC2.P$42
  Top Layer w4: v1(890.81,357.81) 891.08,357.55 891.08,349.12 IC2.P$79@891.34,348.86
  Top Layer w6: C14.1 775.68,566.68 775.68,519.11 IC2.P$3 ; L1.1 881,259.13 C1.2 ; v1(890,275) 890,344.26 890.61,344.87 890.61,348.13 IC2.P$79@891.34,348.86 ; IC2.P$7 891.34,514.72 893,516.38 C15.1 ; IC2.P$11 v1@1001.57,557
  Layer 3 w6: v1(852.5,419.42) 852.5,398.5 864.07,386.93 879,386.93 879.07,387 890,387 894,383 894,365.37 893.94,365.31 893.94,363.11 890.81,359.98 v1(890.81,357.81)
  Layer 4 w3: v1(689.37,404.93) 743.68,404.93 cw(c745.03,392.5) 746.37,404.93 763.93,404.93 765,406 803.16,406 803.6,406.45 816.88,406.45 819.82,403.5 828.5,403.5 828.76,403.24 852.03,403.24 853.78,405 853.78,418.13 v1(852.5,419.42)
  Layer 4 w6: v1(785.51,579.46) 866.35,579.46 v1(886.61,559.2) 897.41,570 945,570 958,557 v1(997,557) 997,554.84 1000.78,551.05 1000.78,477.78 991,468 961.29,468 v1(951,478.29) 950.75,478.29 936.46,464 897.08,464 v1(852.5,419.42)
VDD_DATA: C2.2 C4.2 C22.1 IC2.P$70 L2.1 | length 129.2
  Top Layer w4: IC2.P$70 974.86,375.88 980.86,369.89 v1(981.7,369.89)
  Bottom Layer w6: C2.2 971,396.13 971,374.5 974,371.5 976.6,371.5 976.68,371.42 980.17,371.42 v1(981.7,369.89) 983.23,371.42 989.34,371.42 1007.54,389.61 C4.2 ; C4.2@1017.85,370.07 1019.68,370.07 1022.17,367.58 1022.17,365.75 1031.01,356.9 1031.01,342.74 L2.1
VDD_PHY: C10.1 C12.2 C13.2 IC2.P$31 L3.1 | length 368
  Top Layer w4: IC2.P$31 892.46,457.44 896.68,457.44 907.89,446.24 v1(908,446.24)
  Top Layer w10: C12.2 L3.1 885.01,601.87 901.5,618.36 C13.2
  Layer 3 w6: v2(868,602) 895,575 931,575 947,559 947,513 937,503 937,465.01 919.94,447.95 915.37,447.95 915.19,447.77 909.53,447.77 v1(908,446.24)
  Bottom Layer w3: C10.1@891.98,455.08 894.68,452.37 900.74,452.37 906.88,446.24 v1(908,446.24)
VDD_REG: C20.1 C24.2 L1.2 L2.2 L3.2 L5.1 R1.2 | length 1192.1
  Top Layer w6: L1.2 891.34,184.54 C24.2
  Top Layer w10: C24.2 940.11,184.65 L5.1 1030.55,187.2 1069.14,187.2 1075,193.06 1075,325 v3(1090,340)
  Layer 3 w10: v1(961.77,315.52) 961.77,314.44 963.77,312.44 963.77,312.23 1011,265 1011,166.01 1002.03,157.03 v3(1002.03,154.15)
  Layer 4 w10: v2(865.56,637.34) 996.66,637.34 1036.83,597.17 1036.83,397.83 985,346 985,328.84 972.28,316.12 962.36,316.12 v1(961.77,315.52)
  Bottom Layer w6: C20.1 1032.87,113 1068.7,113 R1.2
VDDA: C43.2 C47.2 IC3.1 IC4.1 J1.4 Q1.2 | length 1531.6
  Top Layer w6: C47.2 587.09,230.13 590.69,226.53 625.34,226.53 v5(625.41,226.46)
  Layer 3 w14: v5(625.41,226.46) 670.44,181.44 928.56,181.44 982.1,127.9 1040.9,127.9 1065.08,152.08 1065.08,554.08 1075,564 1075,566.72 1077,568.72 1077,665.8 1024.8,718 v3(980,718)
  Bottom Layer w6: C43.2 505.87,169.65 IC3.1 556.06,174.41 559.57,177.92 559.57,239.57 579.35,259.35 579.35,261.39 583.24,265.28 583.24,264.3 587.13,260.4 588.12,260.4 603.52,245 617,245 621.53,240.47 621.53,236.98 622.73,235.79 622.73,229.14 v5(625.41,226.46)
  Bottom Layer w10: J1.4 947.64,708.64 957,718 v3(980,718)
VDDIO: C31.1 C32.1 C33.1 C34.1 C35.1 C36.1 C37.1 C38.1 C49.2 C51.2 IC2.P$6 IC2.P$15 IC2.P$16 IC2.P$22 IC2.P$38 IC2.P$41 IC2.P$60 IC2.P$83 L9.1 | length 1097.4
  Top Layer w3: v1(744.95,420.45) 744.95,421.43 753.54,430.02 IC2.P$38
  Top Layer w4: IC2.P$15@780.56,484 IC2.P$15@780.56,486.12 ; IC2.P$15 IC2.P$16 ; IC2.P$16@808.65,486.65 IC2.P$16@809.29,486.01 ; IC2.P$22@974.56,486.12 974.56,487.85 986.78,500.07 v1(986.78,502.29) ; IC2.P$83 1001.57,347.62 1007.63,341.55 v1(1007.63,340.85)
  Top Layer w6: L9.1 613.13,434 C49.2 ; v1@822.75,414.84 834.3,426.39 834.3,428.04 836.22,429.96 IC2.P$41 ; C35.1 862.13,568.13 862.13,560.73 859.3,557.91 859.73,557.49 859.73,554.21 859.3,553.79 859.3,519.19 863.78,514.72 IC2.P$6
  Layer 3 w3: v1(744.95,420.45) 744.95,417.48 748.51,413.91 748.51,413.76 750.27,412 751.93,412 753.01,410.92 760.77,410.92 761.85,412 777.9,412 787.4,402.5 799.66,402.5 803.6,406.45 815.45,406.45 v1(825,416) 813,428 813,467.49 v1(798.14,482.35)
  Layer 3 w6: v3(633,426) 633.11,425.89 633.11,409.82 647,395.93 647,391.46 650,388.46 650,360.14 661.69,348.46 666.66,348.46 687.76,369.56 687.76,372 691.37,375.61 v1(691.37,377.77) ; v1(986.78,502.29) 987.04,502.29 1011.9,477.43 1011.9,347.28 1007.63,343.02 v1(1007.63,340.85)
  Layer 4 w3: v3(633,426) 663,426 672,417 683.77,417 684.2,417.43 694.55,417.43 700.05,411.93 734.66,411.93 743.19,420.45 v1(744.95,420.45) ; v1(798.14,482.35) 808.66,482.35 861.26,534.94 ; v1(861.26,557.91) 861.26,534.94 ; v1(986.78,502.29) 986.78,502.55 954.39,534.94 861.26,534.94
  Bottom Layer w3: 831.92,413.75 832.89,412.79 833.57,412.79 838.89,407.48 C31.1@838.89,406.79 ; C33.1 969.69,485 975,490.31 975,490.51 v1(986.78,502.29) ; C37.1 998,347.31 1002.39,342.93 1005.56,342.93 v1(1007.63,340.85)
VDDIO_PHY: C11.1 C25.2 C26.2 IC2.P$45 L4.1 | length 243.6
  Top Layer w4: IC2.P$45@947,431 v1(952.84,436.84)
  Bottom Layer w3: 1072.76,532.49 1072.76,571.33 1094,592.57 L4.1
  Bottom Layer w6: v1(952.84,436.84) 980.38,436.84 984.82,441.28 988.21,441.28 1006.54,459.61 C26.2 1006.54,466.39 1027.36,487.21 1028.08,487.21 C25.2 1062.87,522.61 1072.76,532.49
VDDIO_PHY_REG: C46.2 IC1.1 IC4.5 L4.2 | length 1147.9
  Layer 3 w6: v1(1089.54,545.84) 1122,513.39 1122,333 v1(1098,309)
  Layer 4 w6: v1(677,237) 686,246 951,246 976.79,220.21 1028.21,220.21 1063,255 1063,272 1098,307 v1(1098,309)
  Bottom Layer w10: C46.2 662,229.65 655.08,222.72 654.6,222.72 634,202.13 634,179 668,145 912.22,145 927.15,159.93 927.15,169.78 932.98,175.6 IC1.1
VDDIO_REG: C42.2 IC3.5 IC4.3 L6.2 L7.2 L8.2 L9.2 | length 681.8
  Top Layer w6: L9.2 543,430.13 543,364.87 L8.2 517,303.13 517,183 524.59,175.41 IC4.3 ; v1(598,164) 610,152 700,152 713.51,165.51 713.51,170.49 713.4,170.6 L7.2 794.4,190.07 L6.2
  Bottom Layer w6: IC3.5@603.47,173.97 603.47,172.12 606.13,169.46 C42.2
pads on no net: FD1.1 FD2.1 FD3.1 FD4.1 FD5.1 FD6.1 FD7.1 FD8.1 H1.P$1 H1.P$2 IC2.P$10 IC2.P$20 IC2.P$32 IC2.P$33 IC2.P$34 IC2.P$35 IC2.P$46 IC2.P$47 IC2.P$56 IC2.P$57 IC2.P$58 IC2.P$59 IC2.P$63 IC3.4 IC4.4 J1.0 J1.MH1 J1.MH2
copper on no net:
  other v2: 543,577 1057,577 544,620 1056,620
  other v4: 200.03,425 1400.03,425

## Polygon pours and split planes (outlines as drawn)
GND on 2-GND "GND_L02_P000" (solid, remove dead copper, pour order 0): 100.03,750 1502,750 1502,99 100.03,99
GND on 5-GND "GND_L05_P001" (solid, remove dead copper, pour order 1): 100.03,750 1502,750 1502,99 100.03,99
GND on Bottom Layer "GND_L06_P002" (solid, remove dead copper, pour order 2): 100.03,750 1502,750 1502,99 100.03,99

## Keep-outs
Keep-Out Layer:
  the board outline again, w5

## Other copper
Bottom Layer:
  region: 1067.1,634.82 1012.66,634.82 1012.66,563.77 1067.1,563.77
  rectangle: 530.53,563.77 587.34,634.82

## Silkscreen, mask and mechanical layers (free items; w line width, h text height)
Bottom Overlay:
  text "AR0234 R1" at 476.99,479 h30 r270
  text "openmv.io" at 914,100.01 h30
Dimension:
  lines w3.94: 1577.85,92.97 1674.52,92.97 1861.28,92.97 1999.17,92.97 ; 1577.85,139.26 1674.52,139.26 1861.28,139.26 1999.17,139.26 ; 1577.85,185.55 1674.52,185.55 1861.28,185.55 1999.17,185.55 ; 1577.85,231.85 1674.52,231.85 1861.28,231.85 1999.17,231.85 ; 1577.85,278.14 1674.52,278.14 1861.28,278.14 1999.17,278.14 ; 1577.85,324.43 1674.52,324.43 1861.28,324.43 1999.17,324.43 ; 1577.85,370.72 1674.52,370.72 1861.28,370.72 1999.17,370.72 ; 1577.85,417.01 1674.52,417.01 1861.28,417.01 1999.17,417.01 ; 1577.85,463.3 1674.52,463.3 1861.28,463.3 1999.17,463.3 ; 1577.85,509.59 1674.52,509.59 1861.28,509.59 1999.17,509.59 ; 1577.85,555.88 1674.52,555.88 1861.28,555.88 1999.17,555.88 ; 1577.85,602.17 1674.52,602.17 1861.28,602.17 1999.17,602.17 ; 1577.85,648.46 1674.52,648.46 1861.28,648.46 1999.17,648.46 ; 1577.85,694.75 1674.52,694.75 1861.28,694.75 1999.17,694.75 ; 1577.85,741.05 1999.17,741.05 ; 1674.52,787.34 1674.52,46.68 ; 1861.28,787.34 1861.28,46.68 ; 1674.52,46.68 1577.85,46.68 1577.85,787.34 1999.17,787.34 1999.17,46.68 1861.28,46.68 ; 1674.52,46.68 1861.28,46.68
  text "OpenMV FHD-GS-AR0234" at 470.58,796.2 h80
  text "Layer" at 1601,752.62 h23.15
  text "Name" at 1697.67,752.62 h23.15
  text "Thickness" at 1884.43,752.62 h23.15
  text "Top Overlay" at 1697.67,706.33 h23.15
  text "Top Solder" at 1697.67,660.04 h23.15
  text "0.010mm" at 1884.43,660.04 h23.15
  text "1" at 1601,613.75 h23.15
  text "Top Layer" at 1697.67,613.75 h23.15
  text "0.035mm" at 1884.43,613.75 h23.15
  text "Dielectric 2" at 1697.67,567.45 h23.15
  text "0.127mm" at 1884.43,567.45 h23.15
  text "2" at 1600.98,521.16 h23.15
  text "2-GND" at 1697.64,521.16 h23.15
  text "0.035mm" at 1884.43,521.16 h23.15
  text "Dielectric 5" at 1697.67,474.87 h23.15
  text "0.254mm" at 1884.43,474.87 h23.15
  text "3" at 1601,428.58 h23.15
  text "Layer 3" at 1697.67,428.58 h23.15
  text "0.035mm" at 1884.43,428.58 h23.15
  text "Dielectric 1" at 1697.67,382.29 h23.15
  text "0.200mm" at 1884.43,382.29 h23.15
  text "4" at 1601,336 h23.15
  text "Layer 4" at 1697.67,336 h23.15
  text "0.035mm" at 1884.43,336 h23.15
  text "Dielectric 6" at 1697.67,289.71 h23.15
  text "0.254mm" at 1884.43,289.71 h23.15
  text "5" at 1601,243.42 h23.15
  text "5-GND" at 1697.67,243.42 h23.15
  text "0.035mm" at 1884.43,243.42 h23.15
  text "Dielectric 9" at 1697.67,197.13 h23.15
  text "0.127mm" at 1884.43,197.13 h23.15
  text "6" at 1601,150.84 h23.15
  text "Bottom Layer" at 1697.67,150.84 h23.15
  text "0.035mm" at 1884.43,150.84 h23.15
  text "Bottom Solder" at 1697.67,104.55 h23.15
  text "0.010mm" at 1884.43,104.55 h23.15
  text "TG-170 or equivalent substrate  / Er = 4.3-4.5 @ 1MHz / +/- 10% /  / double side solder mask red / double side silkscreen white /  / 3 mil min trace width and / 3 mil min isolation /  / RoHS required" at 2084.89,98.4 h30
  text "Bottom Overlay" at 1697.67,58.25 h23.15